# EAGLE board SAMD21_panel (EAGLE 9.1.3)
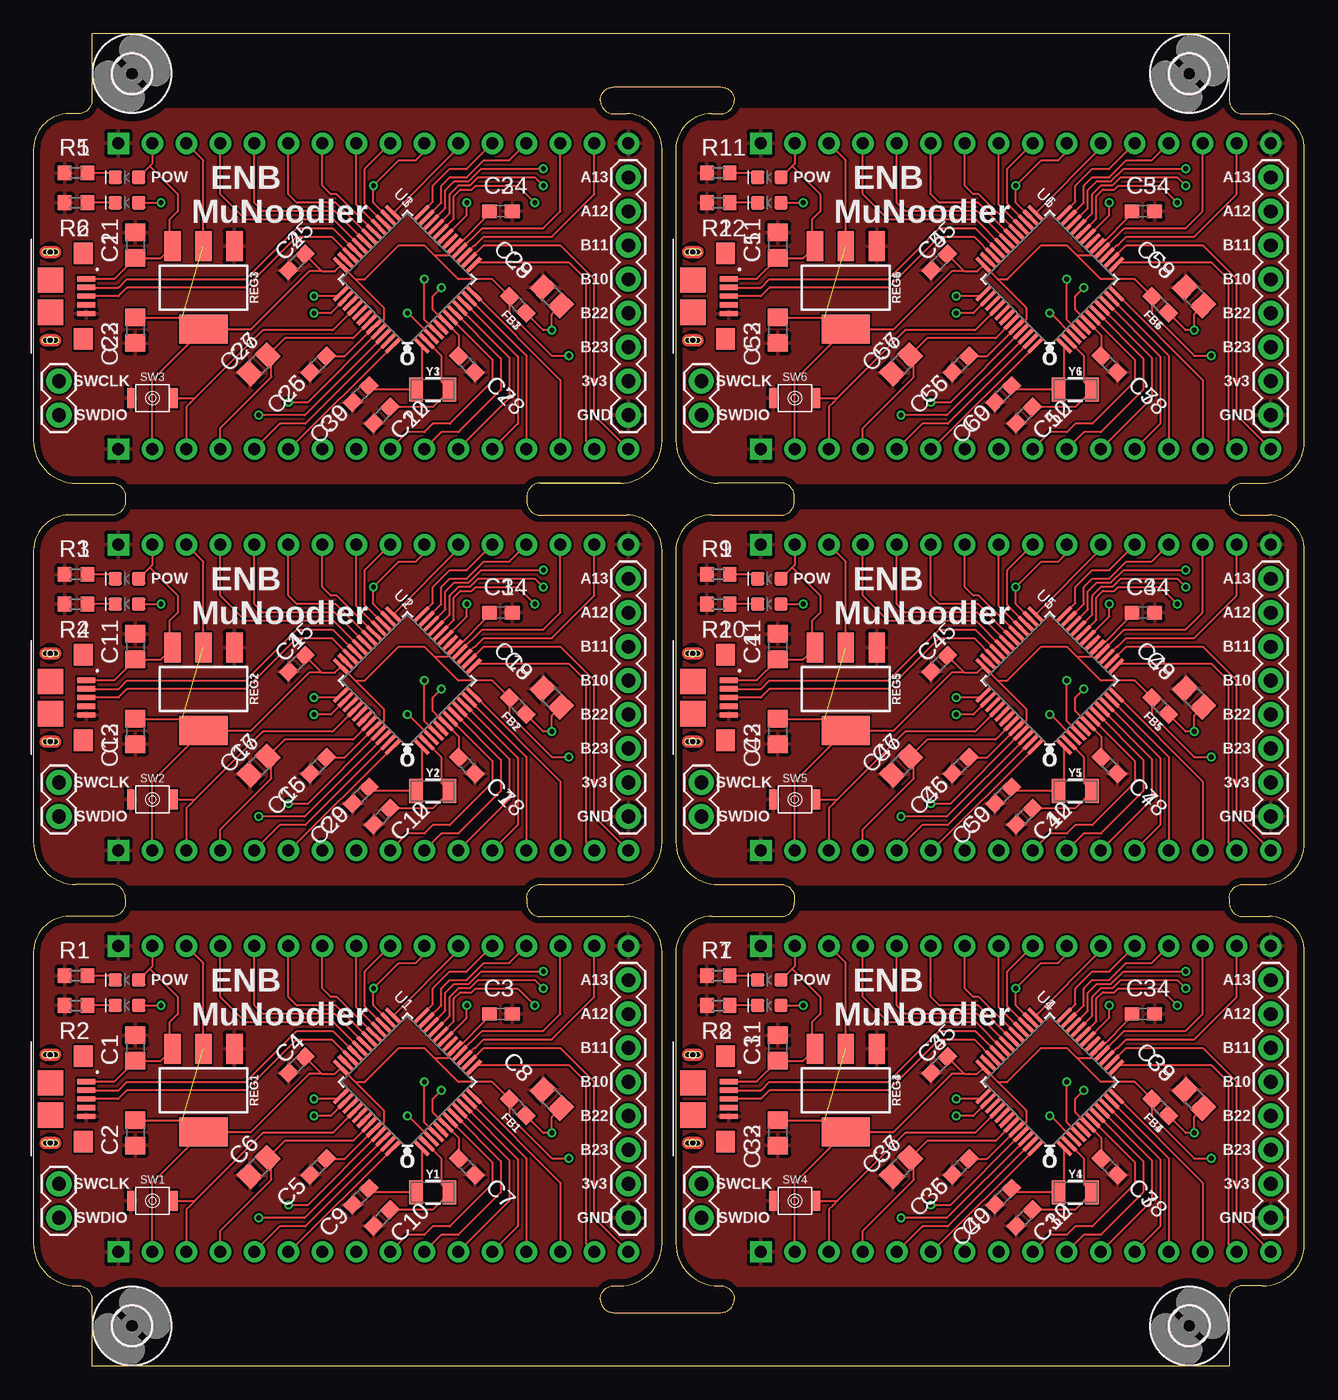
[diagram p0: board, top side]
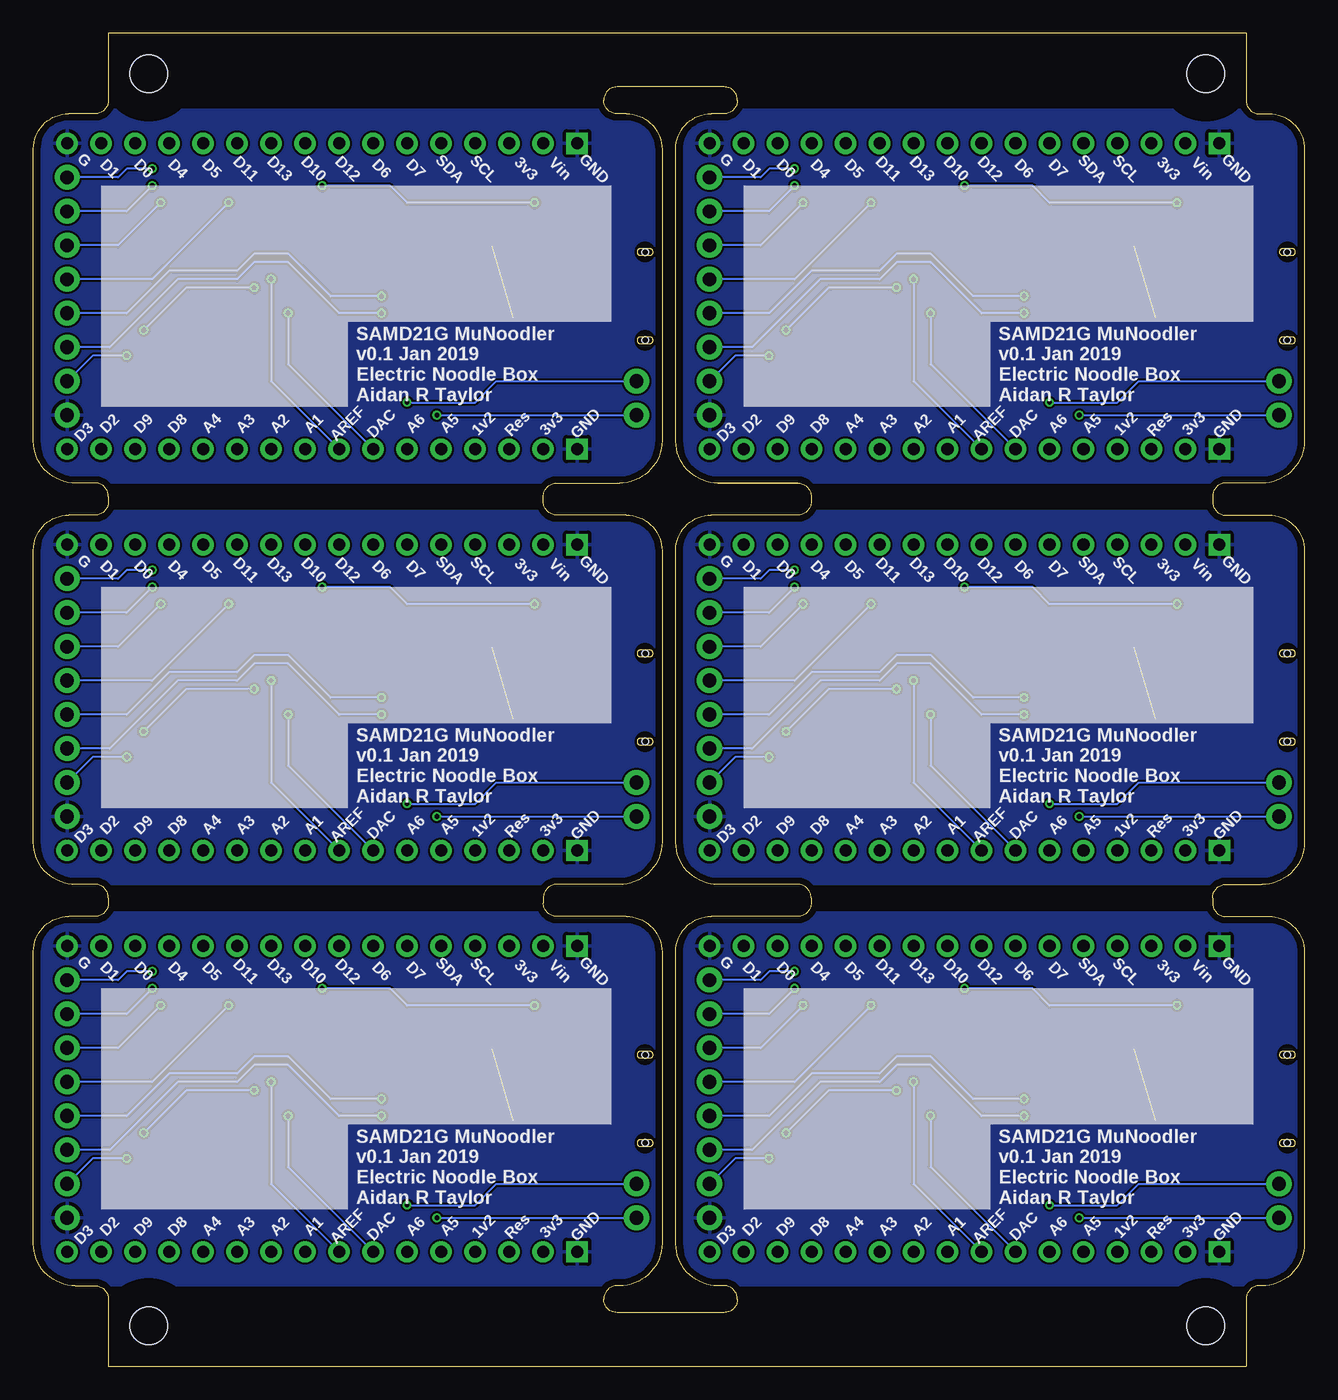
[diagram p1: board, bottom side, seen from below]

Size 94.97 x 99.61 mm. Coordinates in mm from the lower left corner, seen from the top.
Outline: 43.84,66 arc90 46.97,69.13 46.97,90.98 arc90 44.34,93.61 43.37,93.61 arc-90 42.37,94.61 arc-90 43.37,95.61 51.37,95.61 arc-90 52.37,94.61 arc-90 51.37,93.61 50.67,93.61 arc90 48,90.94 48,69.17 arc90 51.18,66 55.87,66 arc-90 56.87,65 56.87,64.61 arc-90 55.87,63.61 50.67,63.61 arc90 48,60.94 48,39.17 arc90 51.18,36 55.87,36 arc-90 56.87,35 56.87,34.61 arc-90 55.87,33.61 50.67,33.61 arc90 48,30.94 48,9.18 arc90 51.18,6 51.37,6 arc-90 52.37,5 arc-90 51.37,4 43.37,4 arc-90 42.37,5 arc-90 43.37,6 43.84,6 arc90 46.97,9.13 46.97,30.98 arc90 44.34,33.61 37.87,33.61 arc-90 36.87,34.61 36.87,35 arc-90 37.87,36 43.84,36 arc90 46.97,39.13 46.97,60.98 arc90 44.34,63.61 37.87,63.61 arc-90 36.87,64.61 36.87,65 arc-90 37.87,66
Outline: 43.84,66 37.87,66
Outline: 37.87,66 43.84,66
Outline: 0,30.94 0,9.18 arc90 3.17,6 3.37,6 arc-90 4.37,5 4.37,0 89.36,0 89.36,5 arc-90 90.36,6 91.83,6 arc90 94.97,9.13 94.97,30.98 arc90 92.34,33.61 90.36,33.61 arc-90 89.36,34.61 89.36,35 arc-90 90.36,36 91.83,36 arc90 94.97,39.13 94.97,60.98 arc90 92.34,63.61 90.36,63.61 arc-90 89.36,64.61 89.36,65 arc-90 90.36,66 91.83,66 arc90 94.97,69.13 94.97,90.98 arc90 92.34,93.61 90.36,93.61 arc-90 89.36,94.61 89.36,99.61 4.37,99.61 4.37,94.61 arc-90 3.37,93.61 2.67,93.61 arc90 0,90.94 0,69.17 arc90 3.17,66 5.87,66 arc-90 6.87,65 6.87,64.61 arc-90 5.87,63.61 2.67,63.61 arc90 0,60.94 0,39.17 arc90 3.17,36 5.87,36 arc-90 6.87,35 6.87,34.61 arc-90 5.87,33.61 2.67,33.61 arc90 0,30.94
Copper layers (1*16): Top 0.035mm / dielectric 1.6mm / Bottom 0.035mm
Design rules "Elecrow_2-layer_PCB_eagle_rule": minimum track width 6mil, minimum drill 12mil, track to track 6mil, track to pad 6mil, pad to pad 6mil, via to via 8mil, smd to smd 0mil, copper to edge 20mil, drill to drill 10mil, minimum pad ring 6mil, minimum via ring 6mil, stop-mask expansion 0mil, vias tented up to drill 100mil, thermal gap 10mil

## Footprints (pad centres in the part's own frame; a part is rotated, then mirrored left to right if it is on the bottom)
C0805 = smd 1.3 x 1.5: 1 -0.95,0; 2 0.95,0
C0603 = smd 1.1 x 1: 1 -0.85,0; 2 0.85,0
LED-0603 = smd 1 x 1: A -0.877,0; C 0.877,0
2,8 = hole 2.8: 0,0
0603 = smd 1.1 x 1: 1 -0.85,0; 2 0.85,0
1X08 = drill 1.016 pad 1.88: 1 0,0; 2 2.54,0; 3 5.08,0; 4 7.62,0; 5 10.16,0; 6 12.7,0; 7 15.24,0; 8 17.78,0
1X02 = drill 1.016 pad 1.88: 1 0,0; 2 2.54,0
FCI_10118193-0001LF = smd 0.4 x 1.35: 1 -1.3,2.675; 2 -0.65,2.675; 3 0,2.675; 4 0.65,2.675; 5 1.3,2.675 | smd 1.6 x 1.4: P1 -3.2,2.45; P2 3.2,2.45 | smd 1.9 x 1.9: P3 1.2,0; P4 -1.2,0 | hole 0.5: -3.3,0; 3.3,0
R0603 = smd 1 x 1.1: 1 -0.85,0; 2 0.85,0
SOT223 = smd 1.219 x 2.235: 1 -2.311,-3.099; 2 0,-3.099; 3 2.311,-3.099 | smd 3.6 x 2.2: 4 0,3.099
KXT3_SMD_SWITCH = smd 0.55 x 1.5: P$1 -1.625,0; P$2 1.625,0
TQFP-48 = smd 1.5 x 0.28: 1 -4.25,2.75; 2 -4.25,2.25; 3 -4.25,1.75; 4 -4.25,1.25; 5 -4.25,0.75; 6 -4.25,0.25; 7 -4.25,-0.25; 8 -4.25,-0.75; 9 -4.25,-1.25; 10 -4.25,-1.75; 11 -4.25,-2.25; 12 -4.25,-2.75; 25 4.25,-2.75; 26 4.25,-2.25; 27 4.25,-1.75; 28 4.25,-1.25; 29 4.25,-0.75; 30 4.25,-0.25; 31 4.25,0.25; 32 4.25,0.75; 33 4.25,1.25; 34 4.25,1.75; 35 4.25,2.25; 36 4.25,2.75 | smd 0.28 x 1.5: 13 -2.75,-4.25; 14 -2.25,-4.25; 15 -1.75,-4.25; 16 -1.25,-4.25; 17 -0.75,-4.25; 18 -0.25,-4.25; 19 0.25,-4.25; 20 0.75,-4.25; 21 1.25,-4.25; 22 1.75,-4.25; 23 2.25,-4.25; 24 2.75,-4.25; 37 2.75,4.25; 38 2.25,4.25; 39 1.75,4.25; 40 1.25,4.25; 41 0.75,4.25; 42 0.25,4.25; 43 -0.25,4.25; 44 -0.75,4.25; 45 -1.25,4.25; 46 -1.75,4.25; 47 -2.25,4.25; 48 -2.75,4.25
HDRV16W64P254_1X16_4064X254X900B_NO_SILK = drill 0.9 pad 1.6 square: P$1 -19.05,0 | drill 0.9 pad 1.6: P$2 -16.51,0; P$3 -13.97,0; P$4 -11.43,0; P$5 -8.89,0; P$6 -6.35,0; P$7 -3.81,0; P$8 -1.27,0; P$9 1.27,0; P$10 3.81,0; P$11 6.35,0; P$12 8.89,0; P$13 11.43,0; P$14 13.97,0; P$15 16.51,0; P$16 19.05,0
CRYSTAL-SMD-3.2X1.5MM = smd 1 x 1.8: P$1 -1.25,0; P$2 1.25,0

## Placement (x,y rotation side)
C1  1uf  [C0805]  7.62,23.78 90 top
C2  10uf  [C0805]  7.62,17.43 270 top
C3  0.1uf  [C0603]  34.93,26.32 0 top
C4  0.1uf  [C0603]  19.68,22.51 45 top
C5  0.1uf  [C0603]  21.27,14.89 225 top
C6  1uf  [C0805]  16.83,14.89 225 top
C7  0.1uf  [C0603]  32.39,14.89 315 top
C8  10uf  [C0805]  38.73,19.97 135 top
C9  15pf  [C0603]  24.45,12.67 225 top
C10  15pf  [C0603]  26.04,11.08 225 top
C11  1uf  [C0805]  7.62,53.78 90 top
C12  15pf  [C0603]  26.04,41.08 225 top
C13  10uf  [C0805]  7.62,47.43 270 top
C14  0.1uf  [C0603]  34.93,56.32 0 top
C15  0.1uf  [C0603]  19.68,52.51 45 top
C16  0.1uf  [C0603]  21.27,44.89 225 top
C17  1uf  [C0805]  16.83,44.89 225 top
C18  0.1uf  [C0603]  32.39,44.89 315 top
C19  10uf  [C0805]  38.73,49.97 135 top
C20  15pf  [C0603]  24.45,42.67 225 top
C21  1uf  [C0805]  7.62,83.78 90 top
C22  15pf  [C0603]  26.04,71.08 225 top
C23  10uf  [C0805]  7.62,77.43 270 top
C24  0.1uf  [C0603]  34.93,86.32 0 top
C25  0.1uf  [C0603]  19.68,82.51 45 top
C26  0.1uf  [C0603]  21.27,74.89 225 top
C27  1uf  [C0805]  16.83,74.89 225 top
C28  0.1uf  [C0603]  32.39,74.89 315 top
C29  10uf  [C0805]  38.73,79.97 135 top
C30  15pf  [C0603]  24.45,72.67 225 top
C31  1uf  [C0805]  55.62,23.78 90 top
C32  15pf  [C0603]  74.03,11.08 225 top
C33  10uf  [C0805]  55.62,17.43 270 top
C34  0.1uf  [C0603]  82.92,26.32 0 top
C35  0.1uf  [C0603]  67.68,22.51 45 top
C36  0.1uf  [C0603]  69.27,14.89 225 top
C37  1uf  [C0805]  64.83,14.89 225 top
C38  0.1uf  [C0603]  80.38,14.89 315 top
C39  10uf  [C0805]  86.73,19.97 135 top
C40  15pf  [C0603]  72.45,12.67 225 top
C41  1uf  [C0805]  55.62,53.78 90 top
C42  15pf  [C0603]  74.03,41.08 225 top
C43  10uf  [C0805]  55.62,47.43 270 top
C44  0.1uf  [C0603]  82.92,56.32 0 top
C45  0.1uf  [C0603]  67.68,52.51 45 top
C46  0.1uf  [C0603]  69.27,44.89 225 top
C47  1uf  [C0805]  64.83,44.89 225 top
C48  0.1uf  [C0603]  80.38,44.89 315 top
C49  10uf  [C0805]  86.73,49.97 135 top
C50  15pf  [C0603]  72.45,42.67 225 top
C51  1uf  [C0805]  55.62,83.78 90 top
C52  15pf  [C0603]  74.03,71.08 225 top
C53  10uf  [C0805]  55.62,77.43 270 top
C54  0.1uf  [C0603]  82.92,86.32 0 top
C55  0.1uf  [C0603]  67.68,82.51 45 top
C56  0.1uf  [C0603]  69.27,74.89 225 top
C57  1uf  [C0805]  64.83,74.89 225 top
C58  0.1uf  [C0603]  80.38,74.89 315 top
C59  10uf  [C0805]  86.73,79.97 135 top
C60  15pf  [C0603]  72.45,72.67 225 top
D1  [LED-0603]  6.99,28.86 180 top
D2  [LED-0603]  6.99,26.95 180 top
D3  [LED-0603]  6.99,58.86 180 top
D4  [LED-0603]  6.99,56.95 180 top
D5  [LED-0603]  6.99,88.86 180 top
D6  [LED-0603]  6.99,86.95 180 top
D7  [LED-0603]  54.98,28.86 180 top
D8  [LED-0603]  54.98,26.95 180 top
D9  [LED-0603]  54.98,58.86 180 top
D10  [LED-0603]  54.98,56.95 180 top
D11  [LED-0603]  54.98,88.86 180 top
D12  [LED-0603]  54.98,86.95 180 top
E$1  [2,8]  7.37,3 0 top
E$2  [2,8]  86.36,3 0 top
E$3  [2,8]  86.36,96.61 0 top
E$4  [2,8]  7.37,96.61 0 top
FB1  120  [0603]  36.2,19.34 315 top
FB2  120  [0603]  36.2,49.34 315 top
FB3  120  [0603]  36.2,79.33 315 top
FB4  120  [0603]  84.19,19.34 315 top
FB5  120  [0603]  84.19,49.34 315 top
FB6  120  [0603]  84.19,79.33 315 top
J1  [1X08]  44.45,11.08 90 top
J2  [1X02]  1.91,13.62 270 top
J3  [1X08]  44.45,41.08 90 top
J4  [1X02]  1.91,43.62 270 top
J5  [1X08]  44.45,71.08 90 top
J6  [1X02]  1.91,73.62 270 top
J7  [1X08]  92.45,11.08 90 top
J8  [1X02]  49.91,13.62 270 top
J9  [1X08]  92.45,41.08 90 top
J10  [1X02]  49.91,43.62 270 top
J11  [1X08]  92.45,71.08 90 top
J12  [1X02]  49.91,73.62 270 top
P1  10118193-0001LF  [FCI_10118193-0001LF]  1.27,19.97 270 top
P2  10118193-0001LF  [FCI_10118193-0001LF]  1.27,49.97 270 top
P3  10118193-0001LF  [FCI_10118193-0001LF]  1.27,79.97 270 top
P4  10118193-0001LF  [FCI_10118193-0001LF]  49.27,19.97 270 top
P5  10118193-0001LF  [FCI_10118193-0001LF]  49.27,49.97 270 top
P6  10118193-0001LF  [FCI_10118193-0001LF]  49.27,79.97 270 top
R1  400  [R0603]  3.17,29.18 0 top
R2  60  [R0603]  3.17,26.95 0 top
R3  400  [R0603]  3.17,59.18 0 top
R4  60  [R0603]  3.17,56.95 0 top
R5  400  [R0603]  3.17,89.18 0 top
R6  60  [R0603]  3.17,86.95 0 top
R7  400  [R0603]  51.18,29.18 0 top
R8  60  [R0603]  51.18,26.95 0 top
R9  400  [R0603]  51.18,59.18 0 top
R10  60  [R0603]  51.18,56.95 0 top
R11  400  [R0603]  51.18,89.18 0 top
R12  60  [R0603]  51.18,86.95 0 top
REG1  TLV1117LV33DCYT  [SOT223]  12.7,20.61 180 top
REG2  TLV1117LV33DCYT  [SOT223]  12.7,50.6 180 top
REG3  TLV1117LV33DCYT  [SOT223]  12.7,80.61 180 top
REG4  TLV1117LV33DCYT  [SOT223]  60.7,20.61 180 top
REG5  TLV1117LV33DCYT  [SOT223]  60.7,50.6 180 top
REG6  TLV1117LV33DCYT  [SOT223]  60.7,80.61 180 top
SW1  KXT3_LOWPROFILE_SMDSWITCH  [KXT3_SMD_SWITCH]  8.89,12.35 180 top
SW2  KXT3_LOWPROFILE_SMDSWITCH  [KXT3_SMD_SWITCH]  8.89,42.35 180 top
SW3  KXT3_LOWPROFILE_SMDSWITCH  [KXT3_SMD_SWITCH]  8.89,72.35 180 top
SW4  KXT3_LOWPROFILE_SMDSWITCH  [KXT3_SMD_SWITCH]  56.89,12.35 180 top
SW5  KXT3_LOWPROFILE_SMDSWITCH  [KXT3_SMD_SWITCH]  56.89,42.35 180 top
SW6  KXT3_LOWPROFILE_SMDSWITCH  [KXT3_SMD_SWITCH]  56.89,72.35 180 top
U1  ATSAMD21G-A  [TQFP-48]  27.94,21.24 135 top
U2  ATSAMD21G-A  [TQFP-48]  27.94,51.24 135 top
U3  ATSAMD21G-A  [TQFP-48]  27.94,81.24 135 top
U4  ATSAMD21G-A  [TQFP-48]  75.94,21.24 135 top
U5  ATSAMD21G-A  [TQFP-48]  75.94,51.24 135 top
U6  ATSAMD21G-A  [TQFP-48]  75.94,81.24 135 top
U$1  HEADER_16X1  [HDRV16W64P254_1X16_4064X254X900B_NO_SILK]  25.4,8.54 0 top
U$2  HEADER_16X1  [HDRV16W64P254_1X16_4064X254X900B_NO_SILK]  25.4,31.4 0 top
U$3  HEADER_16X1  [HDRV16W64P254_1X16_4064X254X900B_NO_SILK]  25.4,38.54 0 top
U$4  HEADER_16X1  [HDRV16W64P254_1X16_4064X254X900B_NO_SILK]  25.4,61.4 0 top
U$5  HEADER_16X1  [HDRV16W64P254_1X16_4064X254X900B_NO_SILK]  25.4,68.54 0 top
U$6  HEADER_16X1  [HDRV16W64P254_1X16_4064X254X900B_NO_SILK]  25.4,91.4 0 top
U$7  HEADER_16X1  [HDRV16W64P254_1X16_4064X254X900B_NO_SILK]  73.4,8.54 0 top
U$8  HEADER_16X1  [HDRV16W64P254_1X16_4064X254X900B_NO_SILK]  73.4,31.4 0 top
U$9  HEADER_16X1  [HDRV16W64P254_1X16_4064X254X900B_NO_SILK]  73.4,38.54 0 top
U$10  HEADER_16X1  [HDRV16W64P254_1X16_4064X254X900B_NO_SILK]  73.4,61.4 0 top
U$11  HEADER_16X1  [HDRV16W64P254_1X16_4064X254X900B_NO_SILK]  73.4,68.54 0 top
U$12  HEADER_16X1  [HDRV16W64P254_1X16_4064X254X900B_NO_SILK]  73.4,91.4 0 top
Y1  32.768kHz  [CRYSTAL-SMD-3.2X1.5MM]  29.84,12.98 0 top
Y2  32.768kHz  [CRYSTAL-SMD-3.2X1.5MM]  29.84,42.98 0 top
Y3  32.768kHz  [CRYSTAL-SMD-3.2X1.5MM]  29.84,72.98 0 top
Y4  32.768kHz  [CRYSTAL-SMD-3.2X1.5MM]  77.84,12.98 0 top
Y5  32.768kHz  [CRYSTAL-SMD-3.2X1.5MM]  77.84,42.98 0 top
Y6  32.768kHz  [CRYSTAL-SMD-3.2X1.5MM]  77.84,72.98 0 top

## Library data of the parts
C1-C60 = rcl; SPICEPREFIX: C
D1-D12 = SparkFun-LED
E$1-E$4 = holes
FB1-FB6 = SparkFun-Coils; PROD_ID: NDUC-13805
J1 J3 J5 J7 J9 J11 = SparkFun-Connectors; PROD_ID: CONN-08438
J2 J4 J6 J8 J10 J12 = SparkFun-Connectors
P1-P6 = 10118193-0001LF; AVAILABILITY: Unavailable; DESCRIPTION: Conn Micro USB Type B RCP 5 POS 0.65mm Solder RA SMD 5 Terminal 1 Port T/R; MF: Amphenol FCI; MP: 10118193-0001LF; PACKAGE: None; PRICE: None
R1-R12 = rcl; SPICEPREFIX: R
REG1-REG6 SW1-SW6 = ElectricNoodleBox2018
U1-U6 = Albert-Arduino; PROD_ID: IC-13064
U$1-U$12 = Nordic_misc
Y1-Y6 = SparkFun-Clocks; PROD_ID: XTAL-13062

## Nets
1.2VO: C6.1 U1.43 U$1.P$4
1.2VO1: C17.1 U2.43 U$3.P$4
1.2VO2: C27.1 U3.43 U$5.P$4
1.2VO3: C37.1 U4.43 U$7.P$4
1.2VO4: C47.1 U5.43 U$9.P$4
1.2VO5: C57.1 U6.43 U$11.P$4
+3V1: C13.1 C14.1 C15.2 C16.1 FB2.1 J3.2 REG2.2 REG2.4 U2.17 U2.36 U2.44 U$3.P$2 U$4.P$3
+3V2: C23.1 C24.1 C25.2 C26.1 FB3.1 J5.2 REG3.2 REG3.4 U3.17 U3.36 U3.44 U$5.P$2 U$6.P$3
+3V3: C2.1 C3.1 C4.2 C5.1 FB1.1 J1.2 REG1.2 REG1.4 U1.17 U1.36 U1.44 U$1.P$2 U$2.P$3
+3V4: C33.1 C34.1 C35.2 C36.1 FB4.1 J7.2 REG4.2 REG4.4 U4.17 U4.36 U4.44 U$7.P$2 U$8.P$3
+3V5: C43.1 C44.1 C45.2 C46.1 FB5.1 J9.2 REG5.2 REG5.4 U5.17 U5.36 U5.44 U$9.P$2 U$10.P$3
+3V6: C53.1 C54.1 C55.2 C56.1 FB6.1 J11.2 REG6.2 REG6.4 U6.17 U6.36 U6.44 U$11.P$2 U$12.P$3
+5V: C1.1 D1.A P1.1 REG1.3 U$2.P$2
+5V1: C11.1 D3.A P2.1 REG2.3 U$4.P$2
+5V2: C21.1 D5.A P3.1 REG3.3 U$6.P$2
+5V3: C31.1 D7.A P4.1 REG4.3 U$8.P$2
+5V4: C41.1 D9.A P5.1 REG5.3 U$10.P$2
+5V5: C51.1 D11.A P6.1 REG6.3 U$12.P$2
A1: U1.7 U$1.P$9
A2: U1.8 U$1.P$10
A3: U1.9 U$1.P$11
A4: U1.10 U$1.P$12
A5: U1.47 U$1.P$5
A6: U1.48 U$1.P$6
A7: U2.48 U$3.P$6
A8: U2.7 U$3.P$9
A9: U2.8 U$3.P$10
A10: U2.9 U$3.P$11
A11: U2.10 U$3.P$12
A12: U2.47 U$3.P$5
A13: U3.48 U$5.P$6
A14: U3.7 U$5.P$9
A15: U3.8 U$5.P$10
A16: U3.9 U$5.P$11
A17: U3.10 U$5.P$12
A18: U3.47 U$5.P$5
A19: U4.48 U$7.P$6
A20: U4.7 U$7.P$9
A21: U4.8 U$7.P$10
A22: U4.9 U$7.P$11
A23: U4.10 U$7.P$12
A24: U4.47 U$7.P$5
A25: U5.48 U$9.P$6
A26: U5.7 U$9.P$9
A27: U5.8 U$9.P$10
A28: U5.9 U$9.P$11
A29: U5.10 U$9.P$12
A30: U5.47 U$9.P$5
A31: U6.48 U$11.P$6
A32: U6.7 U$11.P$9
A33: U6.8 U$11.P$10
A34: U6.9 U$11.P$11
A35: U6.10 U$11.P$12
A36: U6.47 U$11.P$5
AREF: U1.4 U$1.P$8
AREF1: U2.4 U$3.P$8
AREF2: U3.4 U$5.P$8
AREF3: U4.4 U$7.P$8
AREF4: U5.4 U$9.P$8
AREF5: U6.4 U$11.P$8
D0: U1.16 U$2.P$14
D1: U1.15 U$2.P$15
D2: U1.13 U$1.P$15
D3: U1.14 U$1.P$16
D4: U1.23 U$2.P$13
D5: U1.24 U$2.P$12
D6: U1.29 U$2.P$7
D7: U1.30 U$2.P$6
D8: U1.11 U$1.P$13
D9: U1.12 U$1.P$14
D10: U1.27 U$2.P$9
D11: U1.25 U$2.P$11
D12: U1.28 U$2.P$8
D13: D2.A U1.26 U$2.P$10
D14: U2.12 U$3.P$14
D15: U2.13 U$3.P$15
D16: U2.14 U$3.P$16
D17: U2.15 U$4.P$15
D18: U2.16 U$4.P$14
D19: U2.23 U$4.P$13
D20: U2.24 U$4.P$12
D21: U2.25 U$4.P$11
D22: D4.A U2.26 U$4.P$10
D23: U2.27 U$4.P$9
D24: U2.28 U$4.P$8
D25: U2.29 U$4.P$7
D26: U2.30 U$4.P$6
D27: U2.11 U$3.P$13
D28: U3.12 U$5.P$14
D29: U3.13 U$5.P$15
D30: U3.14 U$5.P$16
D31: U3.15 U$6.P$15
D32: U3.16 U$6.P$14
D33: U3.23 U$6.P$13
D34: U3.24 U$6.P$12
D35: U3.25 U$6.P$11
D36: D6.A U3.26 U$6.P$10
D37: U3.27 U$6.P$9
D38: U3.28 U$6.P$8
D39: U3.29 U$6.P$7
D40: U3.30 U$6.P$6
D41: U3.11 U$5.P$13
D42: U4.12 U$7.P$14
D43: U4.13 U$7.P$15
D44: U4.14 U$7.P$16
D45: U4.15 U$8.P$15
D46: U4.16 U$8.P$14
D47: U4.23 U$8.P$13
D48: U4.24 U$8.P$12
D49: U4.25 U$8.P$11
D50: D8.A U4.26 U$8.P$10
D51: U4.27 U$8.P$9
D52: U4.28 U$8.P$8
D53: U4.29 U$8.P$7
D54: U4.30 U$8.P$6
D55: U4.11 U$7.P$13
D56: U5.12 U$9.P$14
D57: U5.13 U$9.P$15
D58: U5.14 U$9.P$16
D59: U5.15 U$10.P$15
D60: U5.16 U$10.P$14
D61: U5.23 U$10.P$13
D62: U5.24 U$10.P$12
D63: U5.25 U$10.P$11
D64: D10.A U5.26 U$10.P$10
D65: U5.27 U$10.P$9
D66: U5.28 U$10.P$8
D67: U5.29 U$10.P$7
D68: U5.30 U$10.P$6
D69: U5.11 U$9.P$13
D70: U6.12 U$11.P$14
D71: U6.13 U$11.P$15
D72: U6.14 U$11.P$16
D73: U6.15 U$12.P$15
D74: U6.16 U$12.P$14
D75: U6.23 U$12.P$13
D76: U6.24 U$12.P$12
D77: U6.25 U$12.P$11
D78: D12.A U6.26 U$12.P$10
D79: U6.27 U$12.P$9
D80: U6.28 U$12.P$8
D81: U6.29 U$12.P$7
D82: U6.30 U$12.P$6
D83: U6.11 U$11.P$13
DAC: U1.3 U$1.P$7
DAC1: U2.3 U$3.P$7
DAC2: U3.3 U$5.P$7
DAC3: U4.3 U$7.P$7
DAC4: U5.3 U$9.P$7
DAC5: U6.3 U$11.P$7
GND: C1.2 C2.2 C3.2 C4.1 C5.2 C6.2 C7.2 C8.2 C9.2 C10.2 J1.1 P1.5 R1.1 R2.1 REG1.1 SW1.P$2 U1.5 U1.18 U1.35 U1.42 U$1.P$1 U$2.P$1 U$2.P$16
GND1: C11.2 C12.2 C13.2 C14.2 C15.1 C16.2 C17.2 C18.2 C19.2 C20.2 J3.1 P2.5 R3.1 R4.1 REG2.1 SW2.P$2 U2.5 U2.18 U2.35 U2.42 U$3.P$1 U$4.P$1 U$4.P$16
GND2: C21.2 C22.2 C23.2 C24.2 C25.1 C26.2 C27.2 C28.2 C29.2 C30.2 J5.1 P3.5 R5.1 R6.1 REG3.1 SW3.P$2 U3.5 U3.18 U3.35 U3.42 U$5.P$1 U$6.P$1 U$6.P$16
GND3: C31.2 C32.2 C33.2 C34.2 C35.1 C36.2 C37.2 C38.2 C39.2 C40.2 J7.1 P4.5 R7.1 R8.1 REG4.1 SW4.P$2 U4.5 U4.18 U4.35 U4.42 U$7.P$1 U$8.P$1 U$8.P$16
GND4: C41.2 C42.2 C43.2 C44.2 C45.1 C46.2 C47.2 C48.2 C49.2 C50.2 J9.1 P5.5 R9.1 R10.1 REG5.1 SW5.P$2 U5.5 U5.18 U5.35 U5.42 U$9.P$1 U$10.P$1 U$10.P$16
GND5: C51.2 C52.2 C53.2 C54.2 C55.1 C56.2 C57.2 C58.2 C59.2 C60.2 J11.1 P6.5 R11.1 R12.1 REG6.1 SW6.P$2 U6.5 U6.18 U6.35 U6.42 U$11.P$1 U$12.P$1 U$12.P$16
N$1: C7.1 C8.1 FB1.2 U1.6
N$2: D1.C R1.2
N$3: D2.C R2.2
N$4: C18.1 C19.1 FB2.2 U2.6
N$5: D3.C R3.2
N$6: D4.C R4.2
N$7: C28.1 C29.1 FB3.2 U3.6
N$8: D5.C R5.2
N$9: D6.C R6.2
N$10: C38.1 C39.1 FB4.2 U4.6
N$11: D7.C R7.2
N$12: D8.C R8.2
N$13: C48.1 C49.1 FB5.2 U5.6
N$14: D9.C R9.2
N$15: D10.C R10.2
N$16: C58.1 C59.1 FB6.2 U6.6
N$17: D11.C R11.2
N$18: D12.C R12.2
PA1: J3.7 U2.21
PA2: J3.8 U2.22
PA3: U2.39
PA4: U2.41
PA5: J4.1 U2.45
PA6: J4.2 U2.46
PA7: J5.7 U3.21
PA8: J5.8 U3.22
PA9: U3.39
PA10: U3.41
PA11: J6.1 U3.45
PA12: J1.7 U1.21
PA13: J1.8 U1.22
PA14: J6.2 U3.46
PA15: J7.7 U4.21
PA16: J7.8 U4.22
PA17: U4.39
PA18: U4.41
PA19: J8.1 U4.45
PA20: J8.2 U4.46
PA21: J9.7 U5.21
PA22: J9.8 U5.22
PA23: U5.39
PA24: U5.41
PA25: J10.1 U5.45
PA26: J10.2 U5.46
PA27: U1.39
PA28: U1.41
PA29: J11.7 U6.21
PA30: J2.1 U1.45
PA31: J2.2 U1.46
PA32: J11.8 U6.22
PA33: U6.39
PA34: U6.41
PA35: J12.1 U6.45
PA36: J12.2 U6.46
PB1: J3.5 U2.19
PB2: J3.6 U2.20
PB3: J3.4 U2.37
PB4: J3.3 U2.38
PB5: J5.5 U3.19
PB6: J5.6 U3.20
PB7: J5.4 U3.37
PB8: J5.3 U3.38
PB9: J7.5 U4.19
PB10: J1.5 U1.19
PB11: J1.6 U1.20
PB12: J7.6 U4.20
PB13: J7.4 U4.37
PB14: J7.3 U4.38
PB15: J9.5 U5.19
PB16: J9.6 U5.20
PB17: J9.4 U5.37
PB18: J9.3 U5.38
PB19: J11.5 U6.19
PB20: J11.6 U6.20
PB21: J11.4 U6.37
PB22: J1.4 U1.37
PB23: J1.3 U1.38
PB24: J11.3 U6.38
RESET: SW1.P$1 U1.40 U$1.P$3
RESET1: SW2.P$1 U2.40 U$3.P$3
RESET2: SW3.P$1 U3.40 U$5.P$3
RESET3: SW4.P$1 U4.40 U$7.P$3
RESET4: SW5.P$1 U5.40 U$9.P$3
RESET5: SW6.P$1 U6.40 U$11.P$3
SCL: U1.32 U$2.P$4
SCL1: U2.32 U$4.P$4
SCL2: U3.32 U$6.P$4
SCL3: U4.32 U$8.P$4
SCL4: U5.32 U$10.P$4
SCL5: U6.32 U$12.P$4
SDA: U1.31 U$2.P$5
SDA1: U2.31 U$4.P$5
SDA2: U3.31 U$6.P$5
SDA3: U4.31 U$8.P$5
SDA4: U5.31 U$10.P$5
SDA5: U6.31 U$12.P$5
USB+: P1.3 U1.34
USB+1: P2.3 U2.34
USB+2: P3.3 U3.34
USB+3: P4.3 U4.34
USB+4: P5.3 U5.34
USB+5: P6.3 U6.34
USB-: P1.2 U1.33
USB-1: P2.2 U2.33
USB-2: P3.2 U3.33
USB-3: P4.2 U4.33
USB-4: P5.2 U5.33
USB-5: P6.2 U6.33
XTAL1: C9.1 U1.1 Y1.P$1
XTAL2: C10.1 U1.2 Y1.P$2
XTAL3: C20.1 U2.1 Y2.P$1
XTAL4: C12.1 U2.2 Y2.P$2
XTAL5: C30.1 U3.1 Y3.P$1
XTAL6: C22.1 U3.2 Y3.P$2
XTAL7: C40.1 U4.1 Y4.P$1
XTAL8: C32.1 U4.2 Y4.P$2
XTAL9: C50.1 U5.1 Y5.P$1
XTAL10: C42.1 U5.2 Y5.P$2
XTAL11: C60.1 U6.1 Y6.P$1
XTAL12: C52.1 U6.2 Y6.P$2

## Tracks (layer width: path | path; a pad name or v marks a point on that pad's centre or on a via)
1.2VO
  Top 0.152: U1.43 23.88,16.83 18.77,16.83 C6.1 17.78,15.28 17.78,13.94 13.97,10.13 U$1.P$4
1.2VO1
  Top 0.152: U2.43 23.88,46.83 18.77,46.83 C17.1 17.78,45.28 17.78,43.94 13.97,40.13 U$3.P$4
1.2VO2
  Top 0.152: U3.43 23.88,76.83 18.77,76.83 C27.1 17.78,75.28 17.78,73.94 13.97,70.13 U$5.P$4
1.2VO3
  Top 0.152: U4.43 71.88,16.83 66.77,16.83 C37.1 65.78,15.28 65.78,13.94 61.97,10.13 U$7.P$4
1.2VO4
  Top 0.152: U5.43 71.88,46.83 66.77,46.83 C47.1 65.78,45.28 65.78,43.94 61.97,40.13 U$9.P$4
1.2VO5
  Top 0.152: U6.43 71.88,76.83 66.77,76.83 C57.1 65.78,75.28 65.78,73.94 61.97,70.13 U$11.P$4
+3V1  (via drill 0.35)  (1 unrouted)
  Top 0.152: REG2.2 12.7,55.05 12.7,60.13 U$4.P$3 | REG2.4 12.66,47.47 | 12.66,47.47 12.34,47.15 | 12.34,47.15 12.03,46.83 | 12.03,46.83 11.43,46.24 | C13.1 11.12,48.38 12.34,47.15 | 24.05,51.24 U2.36 22.53,51.84 21.9,51.84 21.56,51.84 | 30.97,53 30.97,53.02 | 30.97,53.02 31.48,53.53 U2.17 31.66,53.72 34.11,56.16 C14.1 | 24.05,51.24 24.76,51.24 27.3,53.78 29.21,53.78 29.96,53.02 | 24.05,51.24 26.18,49.11 26.18,48.21 26.15,48.21 25.65,47.7 U2.44 23.25,45.49 C16.1 | 29.96,53.02 30.97,53.02 | 29.96,53.02 31.75,51.24 34.29,51.24 FB2.1 35.56,49.9 35.56,48.7 38.73,45.52 v40.01,45.52 | C15.2 21.56,51.84 | 12.7,47.43 12.66,47.47 | U$3.P$2 8.89,43.7 12.03,46.83 | 21.56,51.84 20.6,51.84 16.23,47.47 12.66,47.47
  Bottom 0.152: v40.01,45.52 42.55,45.52 J3.2
+3V2  (via drill 0.35)  (1 unrouted)
  Top 0.152: REG3.2 12.7,85.05 12.7,90.13 U$6.P$3 | REG3.4 12.66,77.47 | 12.66,77.47 12.34,77.15 | 12.34,77.15 12.03,76.83 | 12.03,76.83 11.43,76.24 | C23.1 11.12,78.38 12.34,77.15 | 24.05,81.24 U3.36 22.53,81.84 21.9,81.84 21.56,81.84 | 30.97,83 30.97,83.03 | 30.97,83.03 31.48,83.53 U3.17 31.66,83.72 34.11,86.16 C24.1 | 24.05,81.24 24.76,81.24 27.3,83.78 29.21,83.78 29.96,83.03 | 24.05,81.24 26.18,79.11 26.18,78.21 26.15,78.21 25.65,77.7 U3.44 23.25,75.49 C26.1 | 29.96,83.03 30.97,83.03 | 29.96,83.03 31.75,81.24 34.29,81.24 FB3.1 35.56,79.9 35.56,78.7 38.73,75.53 v40.01,75.53 | C25.2 21.56,81.84 | 12.7,77.43 12.66,77.47 | U$5.P$2 8.89,73.7 12.03,76.83 | 21.56,81.84 20.6,81.84 16.23,77.47 12.66,77.47
  Bottom 0.152: v40.01,75.53 42.55,75.53 J5.2
+3V3  (via drill 0.35)  (1 unrouted)
  Top 0.152: REG1.2 12.7,25.05 12.7,30.13 U$2.P$3 | REG1.4 12.66,17.47 | 12.66,17.47 12.34,17.15 | 12.34,17.15 12.03,16.83 | 12.03,16.83 11.43,16.24 | C2.1 11.12,18.38 12.34,17.15 | 24.05,21.24 U1.36 22.53,21.84 21.9,21.84 21.56,21.84 | 30.97,23 30.97,23.02 | 30.97,23.02 31.48,23.53 U1.17 31.66,23.71 34.11,26.16 C3.1 | 24.05,21.24 24.76,21.24 27.3,23.78 29.21,23.78 29.96,23.02 | 24.05,21.24 26.18,19.11 26.18,18.21 26.15,18.21 25.65,17.7 U1.44 23.25,15.49 C5.1 | 29.96,23.02 30.97,23.02 | 29.96,23.02 31.75,21.24 34.29,21.24 FB1.1 35.56,19.9 35.56,18.7 38.73,15.53 v40.01,15.53 | C4.2 21.56,21.84 | 12.7,17.43 12.66,17.47 | U$1.P$2 8.89,13.7 12.03,16.83 | 21.56,21.84 20.6,21.84 16.23,17.47 12.66,17.47
  Bottom 0.152: v40.01,15.53 42.55,15.53 J1.2
+3V4  (via drill 0.35)  (1 unrouted)
  Top 0.152: REG4.2 60.7,25.05 60.7,30.13 U$8.P$3 | REG4.4 60.66,17.47 | 60.66,17.47 60.34,17.15 | 60.34,17.15 60.03,16.83 | 60.03,16.83 59.43,16.24 | C33.1 59.12,18.38 60.34,17.15 | 72.05,21.24 U4.36 70.53,21.84 69.9,21.84 69.56,21.84 | 78.97,23 78.97,23.02 | 78.97,23.02 79.48,23.53 U4.17 79.66,23.71 82.11,26.16 C34.1 | 72.05,21.24 72.77,21.24 75.3,23.78 77.21,23.78 77.96,23.02 | 72.05,21.24 74.18,19.11 74.18,18.21 74.16,18.21 73.65,17.7 U4.44 71.25,15.49 C36.1 | 77.96,23.02 78.97,23.02 | 77.96,23.02 79.75,21.24 82.29,21.24 FB4.1 83.56,19.9 83.56,18.7 86.73,15.53 v88,15.53 | C35.2 69.56,21.84 | 60.7,17.43 60.66,17.47 | U$7.P$2 56.89,13.7 60.03,16.83 | 69.56,21.84 68.6,21.84 64.23,17.47 60.66,17.47
  Bottom 0.152: v88,15.53 90.55,15.53 J7.2
+3V5  (via drill 0.35)  (1 unrouted)
  Top 0.152: REG5.2 60.7,55.05 60.7,60.13 U$10.P$3 | REG5.4 60.66,47.47 | 60.66,47.47 60.34,47.15 | 60.34,47.15 60.03,46.83 | 60.03,46.83 59.43,46.24 | C43.1 59.12,48.38 60.34,47.15 | 72.05,51.24 U5.36 70.53,51.84 69.9,51.84 69.56,51.84 | 78.97,53 78.97,53.02 | 78.97,53.02 79.48,53.53 U5.17 79.66,53.72 82.11,56.16 C44.1 | 72.05,51.24 72.77,51.24 75.3,53.78 77.21,53.78 77.96,53.02 | 72.05,51.24 74.18,49.11 74.18,48.21 74.16,48.21 73.65,47.7 U5.44 71.25,45.49 C46.1 | 77.96,53.02 78.97,53.02 | 77.96,53.02 79.75,51.24 82.29,51.24 FB5.1 83.56,49.9 83.56,48.7 86.73,45.52 v88,45.52 | C45.2 69.56,51.84 | 60.7,47.43 60.66,47.47 | U$9.P$2 56.89,43.7 60.03,46.83 | 69.56,51.84 68.6,51.84 64.23,47.47 60.66,47.47
  Bottom 0.152: v88,45.52 90.55,45.52 J9.2
+3V6  (via drill 0.35)  (1 unrouted)
  Top 0.152: REG6.2 60.7,85.05 60.7,90.13 U$12.P$3 | REG6.4 60.66,77.47 | 60.66,77.47 60.34,77.15 | 60.34,77.15 60.03,76.83 | 60.03,76.83 59.43,76.24 | C53.1 59.12,78.38 60.34,77.15 | 72.05,81.24 U6.36 70.53,81.84 69.9,81.84 69.56,81.84 | 78.97,83 78.97,83.03 | 78.97,83.03 79.48,83.53 U6.17 79.66,83.72 82.11,86.16 C54.1 | 72.05,81.24 72.77,81.24 75.3,83.78 77.21,83.78 77.96,83.03 | 72.05,81.24 74.18,79.11 74.18,78.21 74.16,78.21 73.65,77.7 U6.44 71.25,75.49 C56.1 | 77.96,83.03 78.97,83.03 | 77.96,83.03 79.75,81.24 82.29,81.24 FB6.1 83.56,79.9 83.56,78.7 86.73,75.53 v88,75.53 | C55.2 69.56,81.84 | 60.7,77.43 60.66,77.47 | U$11.P$2 56.89,73.7 60.03,76.83 | 69.56,81.84 68.6,81.84 64.23,77.47 60.66,77.47
  Bottom 0.152: v88,75.53 90.55,75.53 J11.2
+5V
  Top 0.152: P1.1 6.06,21.27 C1.1 9.52,22.83 10.31,23.63 | 10.31,23.63 REG1.3 | 10.31,23.63 10.16,23.78 10.16,25.68 10.79,26.32 10.79,27.59 8.69,29.69 | U$2.P$2 8.89,30.13 | 8.89,30.13 8.89,29.89 | 8.69,29.69 D1.A | 8.89,30.13 8.89,29.89 | 8.89,29.89 8.69,29.69
+5V1
  Top 0.152: P2.1 6.06,51.27 C11.1 9.52,52.83 10.31,53.63 | 10.31,53.63 REG2.3 | 10.31,53.63 10.16,53.78 10.16,55.69 10.79,56.32 10.79,57.59 8.69,59.69 | U$4.P$2 8.89,60.13 | 8.89,60.13 8.89,59.89 | 8.69,59.69 D3.A | 8.89,60.13 8.89,59.89 | 8.89,59.89 8.69,59.69
+5V2
  Top 0.152: P3.1 6.06,81.27 C21.1 9.52,82.83 10.31,83.63 | 10.31,83.63 REG3.3 | 10.31,83.63 10.16,83.78 10.16,85.69 10.79,86.32 10.79,87.59 8.69,89.69 | U$6.P$2 8.89,90.13 8.89,89.89 8.69,89.69 | 8.69,89.69 D5.A
+5V3
  Top 0.152: P4.1 54.06,21.27 C31.1 57.52,22.83 58.31,23.63 | 58.31,23.63 REG4.3 | 58.31,23.63 58.16,23.78 58.16,25.68 58.8,26.32 58.8,27.59 56.69,29.69 | U$8.P$2 56.89,30.13 | 56.89,30.13 56.89,29.89 | 56.69,29.69 D7.A | 56.89,30.13 56.89,29.89 | 56.89,29.89 56.69,29.69
+5V4
  Top 0.152: P5.1 54.06,51.27 C41.1 57.52,52.83 58.31,53.63 | 58.31,53.63 REG5.3 | 58.31,53.63 58.16,53.78 58.16,55.69 58.8,56.32 58.8,57.59 56.69,59.69 | U$10.P$2 56.89,60.13 | 56.89,60.13 56.89,59.89 | 56.69,59.69 D9.A | 56.89,60.13 56.89,59.89 | 56.89,59.89 56.69,59.69
+5V5
  Top 0.152: P6.1 54.06,81.27 C51.1 57.52,82.83 58.31,83.63 | 58.31,83.63 REG6.3 | 58.31,83.63 58.16,83.78 58.16,85.69 58.8,86.32 58.8,87.59 56.69,89.69 | U$12.P$2 56.89,90.13 56.89,89.89 56.69,89.69 | 56.69,89.69 D11.A
A1
  Top 0.152: U1.7 34.29,15.24 34.29,13.62 31.11,10.45 29.84,10.45 29.21,9.81 27.94,9.81 U$1.P$9
A2
  Top 0.152: U1.8 34.93,15.32 34.93,12.98 31.75,9.81 30.48,9.81 U$1.P$10
A3
  Top 0.152: U1.9 35.56,15.39 35.56,12.35 U$1.P$11
A4
  Top 0.152: U1.10 36.2,15.46 36.2,10.45 U$1.P$12
A5
  Top 0.152: U1.47 20.33,10.45 18.41,10.45 U$1.P$5
A6
  Top 0.152: U1.48 19.13,8.54 U$1.P$6
A7
  Top 0.152: U2.48 19.13,38.54 U$3.P$6
A8
  Top 0.152: U2.7 34.29,45.24 34.29,43.62 31.11,40.45 29.84,40.45 29.21,39.81 27.94,39.81 U$3.P$9
A9
  Top 0.152: U2.8 34.93,45.32 34.93,42.98 31.75,39.81 30.48,39.81 U$3.P$10
A10
  Top 0.152: U2.9 35.56,45.39 35.56,42.35 U$3.P$11
A11
  Top 0.152: U2.10 36.2,45.46 36.2,40.45 U$3.P$12
A12
  Top 0.152: U2.47 20.33,40.45 18.41,40.45 U$3.P$5
A13
  Top 0.152: U3.48 19.13,68.54 U$5.P$6
A14
  Top 0.152: U3.7 34.29,75.24 34.29,73.62 31.11,70.44 29.84,70.44 29.21,69.81 27.94,69.81 U$5.P$9
A15
  Top 0.152: U3.8 34.93,75.32 34.93,72.98 31.75,69.81 30.48,69.81 U$5.P$10
A16
  Top 0.152: U3.9 35.56,75.39 35.56,72.35 U$5.P$11
A17
  Top 0.152: U3.10 36.2,75.46 36.2,70.44 U$5.P$12
A18
  Top 0.152: U3.47 20.33,70.44 18.41,70.44 U$5.P$5
A19
  Top 0.152: U4.48 67.13,8.54 U$7.P$6
A20
  Top 0.152: U4.7 82.29,15.24 82.29,13.62 79.11,10.45 77.84,10.45 77.21,9.81 75.94,9.81 U$7.P$9
A21
  Top 0.152: U4.8 82.92,15.32 82.92,12.98 79.75,9.81 78.48,9.81 U$7.P$10
A22
  Top 0.152: U4.9 83.56,15.39 83.56,12.35 U$7.P$11
A23
  Top 0.152: U4.10 84.19,15.46 84.19,10.45 U$7.P$12
A24
  Top 0.152: U4.47 68.33,10.45 66.41,10.45 U$7.P$5
A25
  Top 0.152: U5.48 67.13,38.54 U$9.P$6
A26
  Top 0.152: U5.7 82.29,45.24 82.29,43.62 79.11,40.45 77.84,40.45 77.21,39.81 75.94,39.81 U$9.P$9
A27
  Top 0.152: U5.8 82.92,45.32 82.92,42.98 79.75,39.81 78.48,39.81 U$9.P$10
A28
  Top 0.152: U5.9 83.56,45.39 83.56,42.35 U$9.P$11
A29
  Top 0.152: U5.10 84.19,45.46 84.19,40.45 U$9.P$12
A30
  Top 0.152: U5.47 68.33,40.45 66.41,40.45 U$9.P$5
A31
  Top 0.152: U6.48 67.13,68.54 U$11.P$6
A32
  Top 0.152: U6.7 82.29,75.24 82.29,73.62 79.11,70.44 77.84,70.44 77.21,69.81 75.94,69.81 U$11.P$9
A33
  Top 0.152: U6.8 82.92,75.32 82.92,72.98 79.75,69.81 78.48,69.81 U$11.P$10
A34
  Top 0.152: U6.9 83.56,75.39 83.56,72.35 U$11.P$11
A35
  Top 0.152: U6.10 84.19,75.46 84.19,70.44 U$11.P$12
A36
  Top 0.152: U6.47 68.33,70.44 66.41,70.44 U$11.P$5
AREF  (via drill 0.35)
  Top 0.152: U1.4 29.21,18.2 v29.21,21.24
  Bottom 0.152: v29.21,21.24 29.21,13.62 U$1.P$8
AREF1  (via drill 0.35)
  Top 0.152: U2.4 29.21,48.2 v29.21,51.24
  Bottom 0.152: v29.21,51.24 29.21,43.62 U$3.P$8
AREF2  (via drill 0.35)
  Top 0.152: U3.4 29.21,78.2 v29.21,81.24
  Bottom 0.152: v29.21,81.24 29.21,73.62 U$5.P$8
AREF3  (via drill 0.35)
  Top 0.152: U4.4 77.21,18.2 v77.21,21.24
  Bottom 0.152: v77.21,21.24 77.21,13.62 U$7.P$8
AREF4  (via drill 0.35)
  Top 0.152: U5.4 77.21,48.2 v77.21,51.24
  Bottom 0.152: v77.21,51.24 77.21,43.62 U$9.P$8
AREF5  (via drill 0.35)
  Top 0.152: U6.4 77.21,78.2 v77.21,81.24
  Bottom 0.152: v77.21,81.24 77.21,73.62 U$11.P$8
D0
  Top 0.152: U1.16 33.52,25.05 38.1,25.05 39.37,26.32 U$2.P$14
D1
  Top 0.152: U1.15 32.96,23.78 33.02,23.78 33.66,24.41 38.73,24.41 41.91,27.59 U$2.P$15
D2
  Top 0.152: U1.13 33.1,22.51 40.01,22.51 41.27,21.24 41.27,9.18 U$1.P$15
D3
  Top 0.152: U$1.P$16 41.91,11.08 41.91,21.24 39.37,23.78 33.66,23.78 U1.14
D4
  Top 0.152: U$2.P$13 35.56,30.13 33.66,30.13 32.39,28.86 31.11,28.86 30.48,28.23 30.48,26.95 30.47,26.95 U1.23
D5
  Top 0.152: U1.24 29.84,27.03 29.84,28.23 31.11,29.5 32.39,29.5 U$2.P$12
D6
  Top 0.152: U1.29 22.65,27.59 22.22,27.59 21.59,28.23 U$2.P$7
D7
  Top 0.152: U1.30 22.58,26.95 19.68,26.95 19.05,27.59 19.05,28.86 U$2.P$6
D8
  Top 0.152: U1.11 36.83,15.53 U$1.P$13
D9
  Top 0.152: U1.12 39.37,13.7 U$1.P$14
D10
  Top 0.152: U1.27 24.76,26.89 24.76,29.5 U$2.P$9
D11
  Top 0.152: U1.25 31.75,31.06 U$2.P$11
D12
  Top 0.152: U1.28 24.13,26.82 U$2.P$8
D13  (via drill 0.35)
  Top 0.152: U1.26 25.4,26.96 v25.4,28.23 27.3,30.13 28.57,30.13 29.21,30.77 U$2.P$10 | D2.A v9.53,26.95
  Bottom 0.152: v9.53,26.95 19.05,26.95 20.32,28.23 v25.4,28.23
D14
  Top 0.152: U2.12 39.37,43.7 U$3.P$14
D15
  Top 0.152: U2.13 33.1,52.51 40.01,52.51 41.27,51.24 41.27,39.17 U$3.P$15
D16
  Top 0.152: U$3.P$16 41.91,41.08 41.91,51.24 39.37,53.78 33.66,53.78 U2.14
D17
  Top 0.152: U2.15 32.96,53.78 33.02,53.78 33.66,54.41 38.73,54.41 41.91,57.59 U$4.P$15
D18
  Top 0.152: U2.16 33.52,55.05 38.1,55.05 39.37,56.32 U$4.P$14
D19
  Top 0.152: U$4.P$13 35.56,60.13 33.66,60.13 32.39,58.86 31.11,58.86 30.48,58.23 30.48,56.95 30.47,56.95 U2.23
D20
  Top 0.152: U2.24 29.84,57.03 29.84,58.23 31.11,59.49 32.39,59.49 U$4.P$12
D21
  Top 0.152: U2.25 31.75,61.06 U$4.P$11
D22  (via drill 0.35)
  Top 0.152: U2.26 25.4,56.96 v25.4,58.23 27.3,60.13 28.57,60.13 29.21,60.77 U$4.P$10 | D4.A v9.53,56.95
  Bottom 0.152: v9.53,56.95 19.05,56.95 20.32,58.23 v25.4,58.23
D23
  Top 0.152: U2.27 24.76,56.89 24.76,59.49 U$4.P$9
D24
  Top 0.152: U2.28 24.13,56.82 U$4.P$8
D25
  Top 0.152: U2.29 22.65,57.59 22.22,57.59 21.59,58.23 U$4.P$7
D26
  Top 0.152: U2.30 22.58,56.95 19.68,56.95 19.05,57.59 19.05,58.86 U$4.P$6
D27
  Top 0.152: U2.11 36.83,45.53 U$3.P$13
D28
  Top 0.152: U3.12 39.37,73.7 U$5.P$14
D29
  Top 0.152: U3.13 33.1,82.51 40.01,82.51 41.27,81.24 41.27,69.17 U$5.P$15
D30
  Top 0.152: U$5.P$16 41.91,71.08 41.91,81.24 39.37,83.78 33.66,83.78 U3.14
D31
  Top 0.152: U3.15 32.96,83.78 33.02,83.78 33.66,84.42 38.73,84.42 41.91,87.59 U$6.P$15
D32
  Top 0.152: U3.16 33.52,85.05 38.1,85.05 39.37,86.32 U$6.P$14
D33
  Top 0.152: U$6.P$13 35.56,90.13 33.66,90.13 32.39,88.86 31.11,88.86 30.48,88.22 30.48,86.95 30.47,86.95 U3.23
D34
  Top 0.152: U3.24 29.84,87.03 29.84,88.22 31.11,89.5 32.39,89.5 U$6.P$12
D35
  Top 0.152: U3.25 31.75,91.06 U$6.P$11
D36  (via drill 0.35)
  Top 0.152: U3.26 25.4,86.96 v25.4,88.22 27.3,90.13 28.57,90.13 29.21,90.77 U$6.P$10 | D6.A v9.53,86.95
  Bottom 0.152: v9.53,86.95 19.05,86.95 20.32,88.22 v25.4,88.22
D37
  Top 0.152: U3.27 24.76,86.89 24.76,89.5 U$6.P$9
D38
  Top 0.152: U3.28 24.13,86.82 U$6.P$8
D39
  Top 0.152: U3.29 22.65,87.59 22.22,87.59 21.59,88.22 U$6.P$7
D40
  Top 0.152: U3.30 22.58,86.95 19.68,86.95 19.05,87.59 19.05,88.86 U$6.P$6
D41
  Top 0.152: U3.11 36.83,75.53 U$5.P$13
D42
  Top 0.152: U4.12 87.37,13.7 U$7.P$14
D43
  Top 0.152: U4.13 81.1,22.51 88,22.51 89.27,21.24 89.27,9.18 U$7.P$15
D44
  Top 0.152: U$7.P$16 89.91,11.08 89.91,21.24 87.37,23.78 81.66,23.78 U4.14
D45
  Top 0.152: U4.15 80.95,23.78 81.02,23.78 81.66,24.41 86.73,24.41 89.91,27.59 U$8.P$15
D46
  Top 0.152: U4.16 81.52,25.05 86.1,25.05 87.37,26.32 U$8.P$14
D47
  Top 0.152: U$8.P$13 83.56,30.13 81.66,30.13 80.38,28.86 79.11,28.86 78.48,28.23 78.48,26.95 78.47,26.95 U4.23
D48
  Top 0.152: U4.24 77.84,27.03 77.84,28.23 79.11,29.5 80.38,29.5 U$8.P$12
D49
  Top 0.152: U4.25 79.75,31.06 U$8.P$11
D50  (via drill 0.35)
  Top 0.152: U4.26 73.4,26.96 v73.4,28.23 75.3,30.13 76.57,30.13 77.21,30.77 U$8.P$10 | D8.A v57.52,26.95
  Bottom 0.152: v57.52,26.95 67.05,26.95 68.32,28.23 v73.4,28.23
D51
  Top 0.152: U4.27 72.77,26.89 72.77,29.5 U$8.P$9
D52
  Top 0.152: U4.28 72.13,26.82 U$8.P$8
D53
  Top 0.152: U4.29 70.65,27.59 70.22,27.59 69.59,28.23 U$8.P$7
D54
  Top 0.152: U4.30 70.58,26.95 67.68,26.95 67.05,27.59 67.05,28.86 U$8.P$6
D55
  Top 0.152: U4.11 84.83,15.53 U$7.P$13
D56
  Top 0.152: U5.12 87.37,43.7 U$9.P$14
D57
  Top 0.152: U5.13 81.1,52.51 88,52.51 89.27,51.24 89.27,39.17 U$9.P$15
D58
  Top 0.152: U$9.P$16 89.91,41.08 89.91,51.24 87.37,53.78 81.66,53.78 U5.14
D59
  Top 0.152: U5.15 80.95,53.78 81.02,53.78 81.66,54.41 86.73,54.41 89.91,57.59 U$10.P$15
D60
  Top 0.152: U5.16 81.52,55.05 86.1,55.05 87.37,56.32 U$10.P$14
D61
  Top 0.152: U$10.P$13 83.56,60.13 81.66,60.13 80.38,58.86 79.11,58.86 78.48,58.23 78.48,56.95 78.47,56.95 U5.23
D62
  Top 0.152: U5.24 77.84,57.03 77.84,58.23 79.11,59.49 80.38,59.49 U$10.P$12
D63
  Top 0.152: U5.25 79.75,61.06 U$10.P$11
D64  (via drill 0.35)
  Top 0.152: U5.26 73.4,56.96 v73.4,58.23 75.3,60.13 76.57,60.13 77.21,60.77 U$10.P$10 | D10.A v57.52,56.95
  Bottom 0.152: v57.52,56.95 67.05,56.95 68.32,58.23 v73.4,58.23
D65
  Top 0.152: U5.27 72.77,56.89 72.77,59.49 U$10.P$9
D66
  Top 0.152: U5.28 72.13,56.82 U$10.P$8
D67
  Top 0.152: U5.29 70.65,57.59 70.22,57.59 69.59,58.23 U$10.P$7
D68
  Top 0.152: U5.30 70.58,56.95 67.68,56.95 67.05,57.59 67.05,58.86 U$10.P$6
D69
  Top 0.152: U5.11 84.83,45.53 U$9.P$13
D70
  Top 0.152: U6.12 87.37,73.7 U$11.P$14
D71
  Top 0.152: U6.13 81.1,82.51 88,82.51 89.27,81.24 89.27,69.17 U$11.P$15
D72
  Top 0.152: U$11.P$16 89.91,71.08 89.91,81.24 87.37,83.78 81.66,83.78 U6.14
D73
  Top 0.152: U6.15 80.95,83.78 81.02,83.78 81.66,84.42 86.73,84.42 89.91,87.59 U$12.P$15
D74
  Top 0.152: U6.16 81.52,85.05 86.1,85.05 87.37,86.32 U$12.P$14
D75
  Top 0.152: U$12.P$13 83.56,90.13 81.66,90.13 80.38,88.86 79.11,88.86 78.48,88.22 78.48,86.95 78.47,86.95 U6.23
D76
  Top 0.152: U6.24 77.84,87.03 77.84,88.22 79.11,89.5 80.38,89.5 U$12.P$12
D77
  Top 0.152: U6.25 79.75,91.06 U$12.P$11
D78  (via drill 0.35)
  Top 0.152: U6.26 73.4,86.96 v73.4,88.22 75.3,90.13 76.57,90.13 77.21,90.77 U$12.P$10 | D12.A v57.52,86.95
  Bottom 0.152: v57.52,86.95 67.05,86.95 68.32,88.22 v73.4,88.22
D79
  Top 0.152: U6.27 72.77,86.89 72.77,89.5 U$12.P$9
D80
  Top 0.152: U6.28 72.13,86.82 U$12.P$8
D81
  Top 0.152: U6.29 70.65,87.59 70.22,87.59 69.59,88.22 U$12.P$7
D82
  Top 0.152: U6.30 70.58,86.95 67.68,86.95 67.05,87.59 67.05,88.86 U$12.P$6
D83
  Top 0.152: U6.11 84.83,75.53 U$11.P$13
DAC  (via drill 0.35)
  Top 0.152: U1.3 28,18.7 v27.94,18.7
  Bottom 0.152: v27.94,18.7 27.94,14.89 U$1.P$7
DAC1  (via drill 0.35)
  Top 0.152: U2.3 28,48.7 v27.94,48.7
  Bottom 0.152: v27.94,48.7 27.94,44.89 U$3.P$7
DAC2  (via drill 0.35)
  Top 0.152: U3.3 28,78.7 v27.94,78.7
  Bottom 0.152: v27.94,78.7 27.94,74.89 U$5.P$7
DAC3  (via drill 0.35)
  Top 0.152: U4.3 76,18.7 v75.94,18.7
  Bottom 0.152: v75.94,18.7 75.94,14.89 U$7.P$7
DAC4  (via drill 0.35)
  Top 0.152: U5.3 76,48.7 v75.94,48.7
  Bottom 0.152: v75.94,48.7 75.94,44.89 U$9.P$7
DAC5  (via drill 0.35)
  Top 0.152: U6.3 76,78.7 v75.94,78.7
  Bottom 0.152: v75.94,78.7 75.94,74.89 U$11.P$7
GND
  pour Top: -0.64,6 46.36,6 46.36,33.94 -0.64,33.94
  pour Bottom: -0.64,33.94 -0.64,6 46.36,6 46.36,33.94
GND1
  pour Top: -0.64,36 46.36,36 46.36,63.94 -0.64,63.94
  pour Bottom: -0.64,63.94 -0.64,36 46.36,36 46.36,63.94
GND2
  pour Top: -0.64,66 46.36,66 46.36,93.94 -0.64,93.94
  pour Bottom: -0.64,93.94 -0.64,66 46.36,66 46.36,93.94
GND3
  pour Top: 47.37,6 94.35,6 94.35,33.94 47.37,33.94
  pour Bottom: 47.37,33.94 47.37,6 94.35,6 94.35,33.94
GND4
  pour Top: 47.37,36 94.35,36 94.35,63.94 47.37,63.94
  pour Bottom: 47.37,63.94 47.37,36 94.35,36 94.35,63.94
GND5
  pour Top: 47.37,66 94.35,66 94.35,93.94 47.37,93.94
  pour Bottom: 47.37,93.94 47.37,66 94.35,66 94.35,93.94
N$1  (via drill 0.35)
  Top 0.152: C7.1 31.78,17.04 U1.6 29.84,18.98 29.84,19.97 v30.48,20.61 | C8.1 38.73,18.63 v38.73,17.43 38.1,17.43 FB1.2
  Bottom 0.152: v30.48,20.61 35.56,20.61 v38.73,17.43
N$2
  Top 0.152: R1.2 5.79,29.18 D1.C
N$3
  Top 0.152: D2.C R2.2
N$4  (via drill 0.35)
  Top 0.152: C18.1 31.78,47.04 U2.6 29.84,48.98 29.84,49.97 v30.48,50.6 | C19.1 38.73,48.63 v38.73,47.43 38.1,47.43 FB2.2
  Bottom 0.152: v30.48,50.6 35.56,50.6 v38.73,47.43
N$5
  Top 0.152: R3.2 5.79,59.18 D3.C
N$6
  Top 0.152: D4.C R4.2
N$7  (via drill 0.35)
  Top 0.152: C28.1 31.78,77.04 U3.6 29.84,78.98 29.84,79.97 v30.48,80.61 | C29.1 38.73,78.63 v38.73,77.43 38.1,77.43 FB3.2
  Bottom 0.152: v30.48,80.61 35.56,80.61 v38.73,77.43
N$8
  Top 0.152: R5.2 5.79,89.18 D5.C
N$9
  Top 0.152: D6.C R6.2
N$10  (via drill 0.35)
  Top 0.152: C38.1 79.78,17.04 U4.6 77.84,18.98 77.84,19.97 v78.48,20.61 | C39.1 86.73,18.63 v86.73,17.43 86.1,17.43 FB4.2
  Bottom 0.152: v78.48,20.61 83.56,20.61 v86.73,17.43
N$11
  Top 0.152: R7.2 53.79,29.18 D7.C
N$12
  Top 0.152: D8.C R8.2
N$13  (via drill 0.35)
  Top 0.152: C48.1 79.78,47.04 U5.6 77.84,48.98 77.84,49.97 v78.48,50.6 | C49.1 86.73,48.63 v86.73,47.43 86.1,47.43 FB5.2
  Bottom 0.152: v78.48,50.6 83.56,50.6 v86.73,47.43
N$14
  Top 0.152: R9.2 53.79,59.18 D9.C
N$15
  Top 0.152: D10.C R10.2
N$16  (via drill 0.35)
  Top 0.152: C58.1 79.78,77.04 U6.6 77.84,78.98 77.84,79.97 v78.48,80.61 | C59.1 86.73,78.63 v86.73,77.43 86.1,77.43 FB6.2
  Bottom 0.152: v78.48,80.61 83.56,80.61 v86.73,77.43
N$17
  Top 0.152: R11.2 53.79,89.18 D11.C
N$18
  Top 0.152: D12.C R12.2
PA1  (via drill 0.35)
  Top 0.152: v38.1,58.23 37.47,58.86 33.25,58.86 32.64,58.25 31.77,58.25 31.11,57.59 31.11,56.18 U2.21
  Bottom 0.152: v38.1,58.23 40.01,56.32 J3.7
PA2  (via drill 0.35)
  Top 0.152: U2.22 30.79,56.56 30.79,57.9 31.44,58.55 32.51,58.55 33.45,59.49 v38.1,59.49
  Bottom 0.152: J3.8 40.64,58.86 40.01,59.49 v38.1,59.49
PA5  (via drill 0.35)
  Top 0.152: U2.45 20.5,42.03 v19.05,42.03
  Bottom 0.152: v19.05,42.03 13.97,42.03 12.38,43.62 J4.1
PA6  (via drill 0.35)
  Top 0.152: U2.46 20.25,41.08 v16.83,41.08
  Bottom 0.152: v16.83,41.08 J4.2
PA7  (via drill 0.35)
  Top 0.152: v38.1,88.22 37.47,88.86 33.25,88.86 32.64,88.25 31.77,88.25 31.11,87.59 31.11,86.18 U3.21
  Bottom 0.152: v38.1,88.22 40.01,86.32 J5.7
PA8  (via drill 0.35)
  Top 0.152: U3.22 30.79,86.56 30.79,87.89 31.44,88.56 32.51,88.56 33.45,89.5 v38.1,89.5
  Bottom 0.152: J5.8 40.64,88.86 40.01,89.5 v38.1,89.5
PA11  (via drill 0.35)
  Top 0.152: U3.45 20.5,72.03 v19.05,72.03
  Bottom 0.152: v19.05,72.03 13.97,72.03 12.38,73.62 J6.1
PA12  (via drill 0.35)
  Top 0.152: v38.1,28.23 37.47,28.86 33.25,28.86 32.64,28.25 31.77,28.25 31.11,27.59 31.11,26.18 U1.21
  Bottom 0.152: v38.1,28.23 40.01,26.32 J1.7
PA13  (via drill 0.35)
  Top 0.152: U1.22 30.79,26.56 30.79,27.89 31.44,28.55 32.51,28.55 33.45,29.5 v38.1,29.5
  Bottom 0.152: J1.8 40.64,28.86 40.01,29.5 v38.1,29.5
PA14  (via drill 0.35)
  Top 0.152: U3.46 20.25,71.08 v16.83,71.08
  Bottom 0.152: v16.83,71.08 J6.2
PA15  (via drill 0.35)
  Top 0.152: v86.1,28.23 85.46,28.86 81.25,28.86 80.64,28.25 79.77,28.25 79.11,27.59 79.11,26.18 U4.21
  Bottom 0.152: v86.1,28.23 88,26.32 J7.7
PA16  (via drill 0.35)
  Top 0.152: U4.22 78.78,26.56 78.78,27.89 79.44,28.55 80.51,28.55 81.45,29.5 v86.1,29.5
  Bottom 0.152: J7.8 88.64,28.86 88,29.5 v86.1,29.5
PA19  (via drill 0.35)
  Top 0.152: U4.45 68.5,12.03 v67.05,12.03
  Bottom 0.152: v67.05,12.03 61.97,12.03 60.38,13.62 J8.1
PA20  (via drill 0.35)
  Top 0.152: U4.46 68.25,11.08 v64.83,11.08
  Bottom 0.152: v64.83,11.08 J8.2
PA21  (via drill 0.35)
  Top 0.152: v86.1,58.23 85.46,58.86 81.25,58.86 80.64,58.25 79.77,58.25 79.11,57.59 79.11,56.18 U5.21
  Bottom 0.152: v86.1,58.23 88,56.32 J9.7
PA22  (via drill 0.35)
  Top 0.152: U5.22 78.78,56.56 78.78,57.9 79.44,58.55 80.51,58.55 81.45,59.49 v86.1,59.49
  Bottom 0.152: J9.8 88.64,58.86 88,59.49 v86.1,59.49
PA25  (via drill 0.35)
  Top 0.152: U5.45 68.5,42.03 v67.05,42.03
  Bottom 0.152: v67.05,42.03 61.97,42.03 60.38,43.62 J10.1
PA26  (via drill 0.35)
  Top 0.152: U5.46 68.25,41.08 v64.83,41.08
  Bottom 0.152: v64.83,41.08 J10.2
PA29  (via drill 0.35)
  Top 0.152: v86.1,88.22 85.46,88.86 81.25,88.86 80.64,88.25 79.77,88.25 79.11,87.59 79.11,86.18 U6.21
  Bottom 0.152: v86.1,88.22 88,86.32 J11.7
PA30  (via drill 0.35)
  Top 0.152: U1.45 20.5,12.03 v19.05,12.03
  Bottom 0.152: v19.05,12.03 13.97,12.03 12.38,13.62 J2.1
PA31  (via drill 0.35)
  Top 0.152: U1.46 20.25,11.08 v16.83,11.08
  Bottom 0.152: v16.83,11.08 J2.2
PA32  (via drill 0.35)
  Top 0.152: U6.22 78.78,86.56 78.78,87.89 79.44,88.56 80.51,88.56 81.45,89.5 v86.1,89.5
  Bottom 0.152: J11.8 88.64,88.86 88,89.5 v86.1,89.5
PA35  (via drill 0.35)
  Top 0.152: U6.45 68.5,72.03 v67.05,72.03
  Bottom 0.152: v67.05,72.03 61.97,72.03 60.38,73.62 J12.1
PA36  (via drill 0.35)
  Top 0.152: U6.46 68.25,71.08 v64.83,71.08
  Bottom 0.152: v64.83,71.08 J12.2
PB1  (via drill 0.35)
  Top 0.152: U2.19 32.39,56.04 v32.39,56.95
  Bottom 0.152: v32.39,56.95 38.1,51.24 J3.5
PB2  (via drill 0.35)
  Top 0.152: v37.47,56.95 36.2,58.23 33.04,58.23 32.76,57.95 31.9,57.95 31.42,57.46 31.42,55.78 U2.20
  Bottom 0.152: v37.47,56.95 40.64,53.78 J3.6
PB3  (via drill 0.35)
  Top 0.152: U2.37 22.78,49.97 v20.95,49.97
  Bottom 0.152: J3.4 40.01,48.7 36.83,51.88 31.75,51.88 30.48,53.15 27.94,53.15 24.76,49.97 v20.95,49.97
PB4  (via drill 0.35)
  Top 0.152: U2.38 22.22,48.71 22.22,48.7 v20.95,48.7
  Bottom 0.152: v20.95,48.7 24.13,48.7 27.94,52.51 30.48,52.51 31.75,51.24 36.2,51.24 41.27,46.16 J3.3
PB5  (via drill 0.35)
  Top 0.152: U3.19 32.39,86.04 v32.39,86.95
  Bottom 0.152: v32.39,86.95 38.1,81.24 J5.5
PB6  (via drill 0.35)
  Top 0.152: v37.47,86.95 36.2,88.22 33.04,88.22 32.76,87.95 31.9,87.95 31.42,87.46 31.42,85.78 U3.20
  Bottom 0.152: v37.47,86.95 40.64,83.78 J5.6
PB7  (via drill 0.35)
  Top 0.152: U3.37 22.78,79.97 v20.95,79.97
  Bottom 0.152: J5.4 40.01,78.7 36.83,81.88 31.75,81.88 30.48,83.14 27.94,83.14 24.76,79.97 v20.95,79.97
PB8  (via drill 0.35)
  Top 0.152: U3.38 22.22,78.71 22.22,78.7 v20.95,78.7
  Bottom 0.152: v20.95,78.7 24.13,78.7 27.94,82.51 30.48,82.51 31.75,81.24 36.2,81.24 41.27,76.16 J5.3
PB9  (via drill 0.35)
  Top 0.152: U4.19 80.38,26.04 v80.38,26.95
  Bottom 0.152: v80.38,26.95 86.1,21.24 J7.5
PB10  (via drill 0.35)
  Top 0.152: U1.19 32.39,26.04 v32.39,26.95
  Bottom 0.152: v32.39,26.95 38.1,21.24 J1.5
PB11  (via drill 0.35)
  Top 0.152: v37.47,26.95 36.2,28.23 33.04,28.23 32.76,27.95 31.9,27.95 31.42,27.46 31.42,25.78 U1.20
  Bottom 0.152: v37.47,26.95 40.64,23.78 J1.6
PB12  (via drill 0.35)
  Top 0.152: v85.46,26.95 84.19,28.23 81.04,28.23 80.76,27.95 79.9,27.95 79.42,27.46 79.42,25.78 U4.20
  Bottom 0.152: v85.46,26.95 88.64,23.78 J7.6
PB13  (via drill 0.35)
  Top 0.152: U4.37 70.78,19.97 v68.95,19.97
  Bottom 0.152: J7.4 88,18.7 84.83,21.88 79.75,21.88 78.48,23.14 75.94,23.14 72.77,19.97 v68.95,19.97
PB14  (via drill 0.35)
  Top 0.152: U4.38 70.22,18.71 70.22,18.7 v68.95,18.7
  Bottom 0.152: v68.95,18.7 72.13,18.7 75.94,22.51 78.48,22.51 79.75,21.24 84.19,21.24 89.27,16.16 J7.3
PB15  (via drill 0.35)
  Top 0.152: U5.19 80.38,56.04 v80.38,56.95
  Bottom 0.152: v80.38,56.95 86.1,51.24 J9.5
PB16  (via drill 0.35)
  Top 0.152: v85.46,56.95 84.19,58.23 81.04,58.23 80.76,57.95 79.9,57.95 79.42,57.46 79.42,55.78 U5.20
  Bottom 0.152: v85.46,56.95 88.64,53.78 J9.6
PB17  (via drill 0.35)
  Top 0.152: U5.37 70.78,49.97 v68.95,49.97
  Bottom 0.152: J9.4 88,48.7 84.83,51.88 79.75,51.88 78.48,53.15 75.94,53.15 72.77,49.97 v68.95,49.97
PB18  (via drill 0.35)
  Top 0.152: U5.38 70.22,48.71 70.22,48.7 v68.95,48.7
  Bottom 0.152: v68.95,48.7 72.13,48.7 75.94,52.51 78.48,52.51 79.75,51.24 84.19,51.24 89.27,46.16 J9.3
PB19  (via drill 0.35)
  Top 0.152: U6.19 80.38,86.04 v80.38,86.95
  Bottom 0.152: v80.38,86.95 86.1,81.24 J11.5
PB20  (via drill 0.35)
  Top 0.152: v85.46,86.95 84.19,88.22 81.04,88.22 80.76,87.95 79.9,87.95 79.42,87.46 79.42,85.78 U6.20
  Bottom 0.152: v85.46,86.95 88.64,83.78 J11.6
PB21  (via drill 0.35)
  Top 0.152: U6.37 70.78,79.97 v68.95,79.97
  Bottom 0.152: J11.4 88,78.7 84.83,81.88 79.75,81.88 78.48,83.14 75.94,83.14 72.77,79.97 v68.95,79.97
PB22  (via drill 0.35)
  Top 0.152: U1.37 22.78,19.97 v20.95,19.97
  Bottom 0.152: J1.4 40.01,18.7 36.83,21.88 31.75,21.88 30.48,23.14 27.94,23.14 24.76,19.97 v20.95,19.97
PB23  (via drill 0.35)
  Top 0.152: U1.38 22.22,18.71 22.22,18.7 v20.95,18.7
  Bottom 0.152: v20.95,18.7 24.13,18.7 27.94,22.51 30.48,22.51 31.75,21.24 36.2,21.24 41.27,16.16 J1.3
PB24  (via drill 0.35)
  Top 0.152: U6.38 70.22,78.71 70.22,78.7 v68.95,78.7
  Bottom 0.152: v68.95,78.7 72.13,78.7 75.94,82.51 78.48,82.51 79.75,81.24 84.19,81.24 89.27,76.16 J11.3
RESET
  Top 0.152: 12.06,12.35 17.14,17.43 22.36,17.43 U1.40 | U$1.P$3 11.43,11.71 11.75,12.03 12.06,12.35 | SW1.P$1 12.06,12.35
RESET1
  Top 0.152: 12.06,42.35 17.14,47.43 22.36,47.43 U2.40 | U$3.P$3 11.43,41.72 11.75,42.03 12.06,42.35 | SW2.P$1 12.06,42.35
RESET2
  Top 0.152: 12.06,72.35 17.14,77.43 22.36,77.43 U3.40 | U$5.P$3 11.43,71.72 11.75,72.03 12.06,72.35 | SW3.P$1 12.06,72.35
RESET3
  Top 0.152: 60.07,12.35 65.14,17.43 70.36,17.43 U4.40 | U$7.P$3 59.43,11.71 59.75,12.03 60.07,12.35 | SW4.P$1 60.07,12.35
RESET4
  Top 0.152: 60.07,42.35 65.14,47.43 70.36,47.43 U5.40 | U$9.P$3 59.43,41.72 59.75,42.03 60.07,42.35 | SW5.P$1 60.07,42.35
RESET5
  Top 0.152: 60.07,72.35 65.14,77.43 70.36,77.43 U6.40 | U$11.P$3 59.43,71.72 59.75,72.03 60.07,72.35 | SW6.P$1 60.07,72.35
SCL
  Top 0.152: U$2.P$4 13.97,27.59 15.88,25.68 22.43,25.68 U1.32
SCL1
  Top 0.152: U$4.P$4 13.97,57.59 15.88,55.69 22.43,55.69 U2.32
SCL2
  Top 0.152: U$6.P$4 13.97,87.59 15.88,85.69 22.43,85.69 U3.32
SCL3
  Top 0.152: U$8.P$4 61.97,27.59 63.88,25.68 70.43,25.68 U4.32
SCL4
  Top 0.152: U$10.P$4 61.97,57.59 63.88,55.69 70.43,55.69 U5.32
SCL5
  Top 0.152: U$12.P$4 61.97,87.59 63.88,85.69 70.43,85.69 U6.32
SDA
  Top 0.152: U$2.P$5 16.51,26.95 17.14,26.32 22.51,26.32 U1.31
SDA1
  Top 0.152: U$4.P$5 16.51,56.95 17.14,56.32 22.51,56.32 U2.31
SDA2
  Top 0.152: U$6.P$5 16.51,86.95 17.14,86.32 22.51,86.32 U3.31
SDA3
  Top 0.152: U$8.P$5 64.51,26.95 65.14,26.32 70.51,26.32 U4.31
SDA4
  Top 0.152: U$10.P$5 64.51,56.95 65.14,56.32 70.51,56.32 U5.31
SDA5
  Top 0.152: U$12.P$5 64.51,86.95 65.14,86.32 70.51,86.32 U6.31
USB+
  Top 0.152: U1.34 22.29,24.41 19.68,24.41 15.88,20.61 6.99,20.61 6.35,19.97 P1.3
USB+1
  Top 0.152: U2.34 22.29,54.41 19.68,54.41 15.88,50.6 6.99,50.6 6.35,49.97 P2.3
USB+2
  Top 0.152: U3.34 22.29,84.42 19.68,84.42 15.88,80.61 6.99,80.61 6.35,79.97 P3.3
USB+3
  Top 0.152: U4.34 70.29,24.41 67.68,24.41 63.88,20.61 54.98,20.61 54.35,19.97 P4.3
USB+4
  Top 0.152: U5.34 70.29,54.41 67.68,54.41 63.88,50.6 54.98,50.6 54.35,49.97 P5.3
USB+5
  Top 0.152: U6.34 70.29,84.42 67.68,84.42 63.88,80.61 54.98,80.61 54.35,79.97 P6.3
USB-
  Top 0.152: U1.33 22.36,25.05 19.68,25.05 15.88,21.24 6.99,21.24 6.37,20.62 P1.2
USB-1
  Top 0.152: U2.33 22.36,55.05 19.68,55.05 15.88,51.24 6.99,51.24 6.37,50.62 P2.2
USB-2
  Top 0.152: U3.33 22.36,85.05 19.68,85.05 15.88,81.24 6.99,81.24 6.37,80.62 P3.2
USB-3
  Top 0.152: U4.33 70.36,25.05 67.68,25.05 63.88,21.24 54.98,21.24 54.37,20.62 P4.2
USB-4
  Top 0.152: U5.33 70.36,55.05 67.68,55.05 63.88,51.24 54.98,51.24 54.37,50.62 P5.2
USB-5
  Top 0.152: U6.33 70.36,85.05 67.68,85.05 63.88,81.24 54.98,81.24 54.37,80.62 P6.2
XTAL1
  Top 0.152: U1.1 29,13.39 Y1.P$1 25.33,12.98 C9.1
XTAL2
  Top 0.152: C10.1 29.84,11.68 31.09,12.93 Y1.P$2 30.48,13.6 30.48,15.52 U1.2
XTAL3
  Top 0.152: U2.1 29,43.39 Y2.P$1 25.33,42.98 C20.1
XTAL4
  Top 0.152: C12.1 29.84,41.68 31.09,42.93 Y2.P$2 30.48,43.6 30.48,45.52 U2.2
XTAL5
  Top 0.152: U3.1 29,73.39 Y3.P$1 25.33,72.98 C30.1
XTAL6
  Top 0.152: C22.1 29.84,71.68 31.09,72.93 Y3.P$2 30.48,73.6 30.48,75.52 U3.2
XTAL7
  Top 0.152: U4.1 77,13.39 Y4.P$1 73.33,12.98 C40.1
XTAL8
  Top 0.152: C32.1 77.84,11.68 79.09,12.93 Y4.P$2 78.48,13.6 78.48,15.52 U4.2
XTAL9
  Top 0.152: U5.1 77,43.39 Y5.P$1 73.33,42.98 C50.1
XTAL10
  Top 0.152: C42.1 77.84,41.68 79.09,42.93 Y5.P$2 78.48,43.6 78.48,45.52 U5.2
XTAL11
  Top 0.152: U6.1 77,73.39 Y6.P$1 73.33,72.98 C60.1
XTAL12
  Top 0.152: C52.1 77.84,71.68 79.09,72.93 Y6.P$2 78.48,73.6 78.48,75.52 U6.2
(copper drawn outside any net)
  shapes: Top circle x4

## Text on the board
tPlace: POW | ENB | A13 | POW | ENB | A13 | MuNoodler | A12 | MuNoodler | A12 | B11 | B11 | B10 | B10 | B22 | B22 | o | B23 | o | B23 | SWCLK | 3v3 | SWCLK | 3v3 | SWDIO | GND | SWDIO | GND | POW | ENB | A13 | POW | ENB | A13 | MuNoodler | A12 | MuNoodler | A12 | B11 | B11 | B10 | B10 | B22 | B22 | o | B23 | o | B23 | SWCLK | 3v3 | SWCLK | 3v3 | SWDIO | GND | SWDIO | GND | POW | ENB | A13 | POW | ENB | A13 | MuNoodler | A12 | MuNoodler | A12 | B11 | B11 | B10 | B10 | B22 | B22 | o | B23 | o | B23 | SWCLK | 3v3 | SWCLK | 3v3 | SWDIO | GND | SWDIO | GND
bPlace: G | G | GND | Vin | 3v3 | SCL | SDA | D7 | D6 | D12 | D10 | D13 | D11 | D5 | D4 | D0 | D1 | GND | Vin | 3v3 | SCL | SDA | D7 | D6 | D12 | D10 | D13 | D11 | D5 | D4 | D0 | D1 | SAMD21G MuNoodler / v0.1 Jan 2019 / Electric Noodle Box / Aidan R Taylor | SAMD21G MuNoodler / v0.1 Jan 2019 / Electric Noodle Box / Aidan R Taylor | GND | 3v3 | Res | 1v2 | A5 | A6 | DAC | AREF | A1 | A2 | A3 | A4 | D8 | D9 | D2 | D3 | GND | 3v3 | Res | 1v2 | A5 | A6 | DAC | AREF | A1 | A2 | A3 | A4 | D8 | D9 | D2 | D3 | G | G | GND | Vin | 3v3 | SCL | SDA | D7 | D6 | D12 | D10 | D13 | D11 | D5 | D4 | D0 | D1 | GND | Vin | 3v3 | SCL | SDA | D7 | D6 | D12 | D10 | D13 | D11 | D5 | D4 | D0 | D1 | SAMD21G MuNoodler / v0.1 Jan 2019 / Electric Noodle Box / Aidan R Taylor | SAMD21G MuNoodler / v0.1 Jan 2019 / Electric Noodle Box / Aidan R Taylor | GND | 3v3 | Res | 1v2 | A5 | A6 | DAC | AREF | A1 | A2 | A3 | A4 | D8 | D9 | D2 | D3 | GND | 3v3 | Res | 1v2 | A5 | A6 | DAC | AREF | A1 | A2 | A3 | A4 | D8 | D9 | D2 | D3 | G | G | GND | Vin | 3v3 | SCL | SDA | D7 | D6 | D12 | D10 | D13 | D11 | D5 | D4 | D0 | D1 | GND | Vin | 3v3 | SCL | SDA | D7 | D6 | D12 | D10 | D13 | D11 | D5 | D4 | D0 | D1 | SAMD21G MuNoodler / v0.1 Jan 2019 / Electric Noodle Box / Aidan R Taylor | SAMD21G MuNoodler / v0.1 Jan 2019 / Electric Noodle Box / Aidan R Taylor | GND | 3v3 | Res | 1v2 | A5 | A6 | DAC | AREF | A1 | A2 | A3 | A4 | D8 | D9 | D2 | D3 | GND | 3v3 | Res | 1v2 | A5 | A6 | DAC | AREF | A1 | A2 | A3 | A4 | D8 | D9 | D2 | D3
_tPlace: SW1 | SW1 | SW1 | SW1 | SW1 | SW1
_tNames: R1 | R1 | U1 | C3 | U1 | C3 | R2 | R2 | C1 | C4 | C1 | C4 | C8 | C8 | REG1 | REG1 | C2 | FB1 | C2 | FB1 | C6 | C6 | C5 | Y1 | C5 | Y1 | C7 | C7 | C9 | C10 | C9 | C10 | R1 | R1 | U1 | C3 | U1 | C3 | R2 | R2 | C1 | C4 | C1 | C4 | C8 | C8 | REG1 | REG1 | C2 | FB1 | C2 | FB1 | C6 | C6 | C5 | Y1 | C5 | Y1 | C7 | C7 | C9 | C10 | C9 | C10 | R1 | R1 | U1 | C3 | U1 | C3 | R2 | R2 | C1 | C4 | C1 | C4 | C8 | C8 | REG1 | REG1 | C2 | FB1 | C2 | FB1 | C6 | C6 | C5 | Y1 | C5 | Y1 | C7 | C7 | C9 | C10 | C9 | C10